# Altium PCB TIPD156 PCB.PcbDoc
Units mil, origin at the board's own origin, x right, y up, seen from the top; angles counter-clockwise.
Board outline 1600 x 1900 mil, 2 copper layers (Top Layer, Bottom Layer); 24 components, 8 nets, 38 pads, 12 vias.
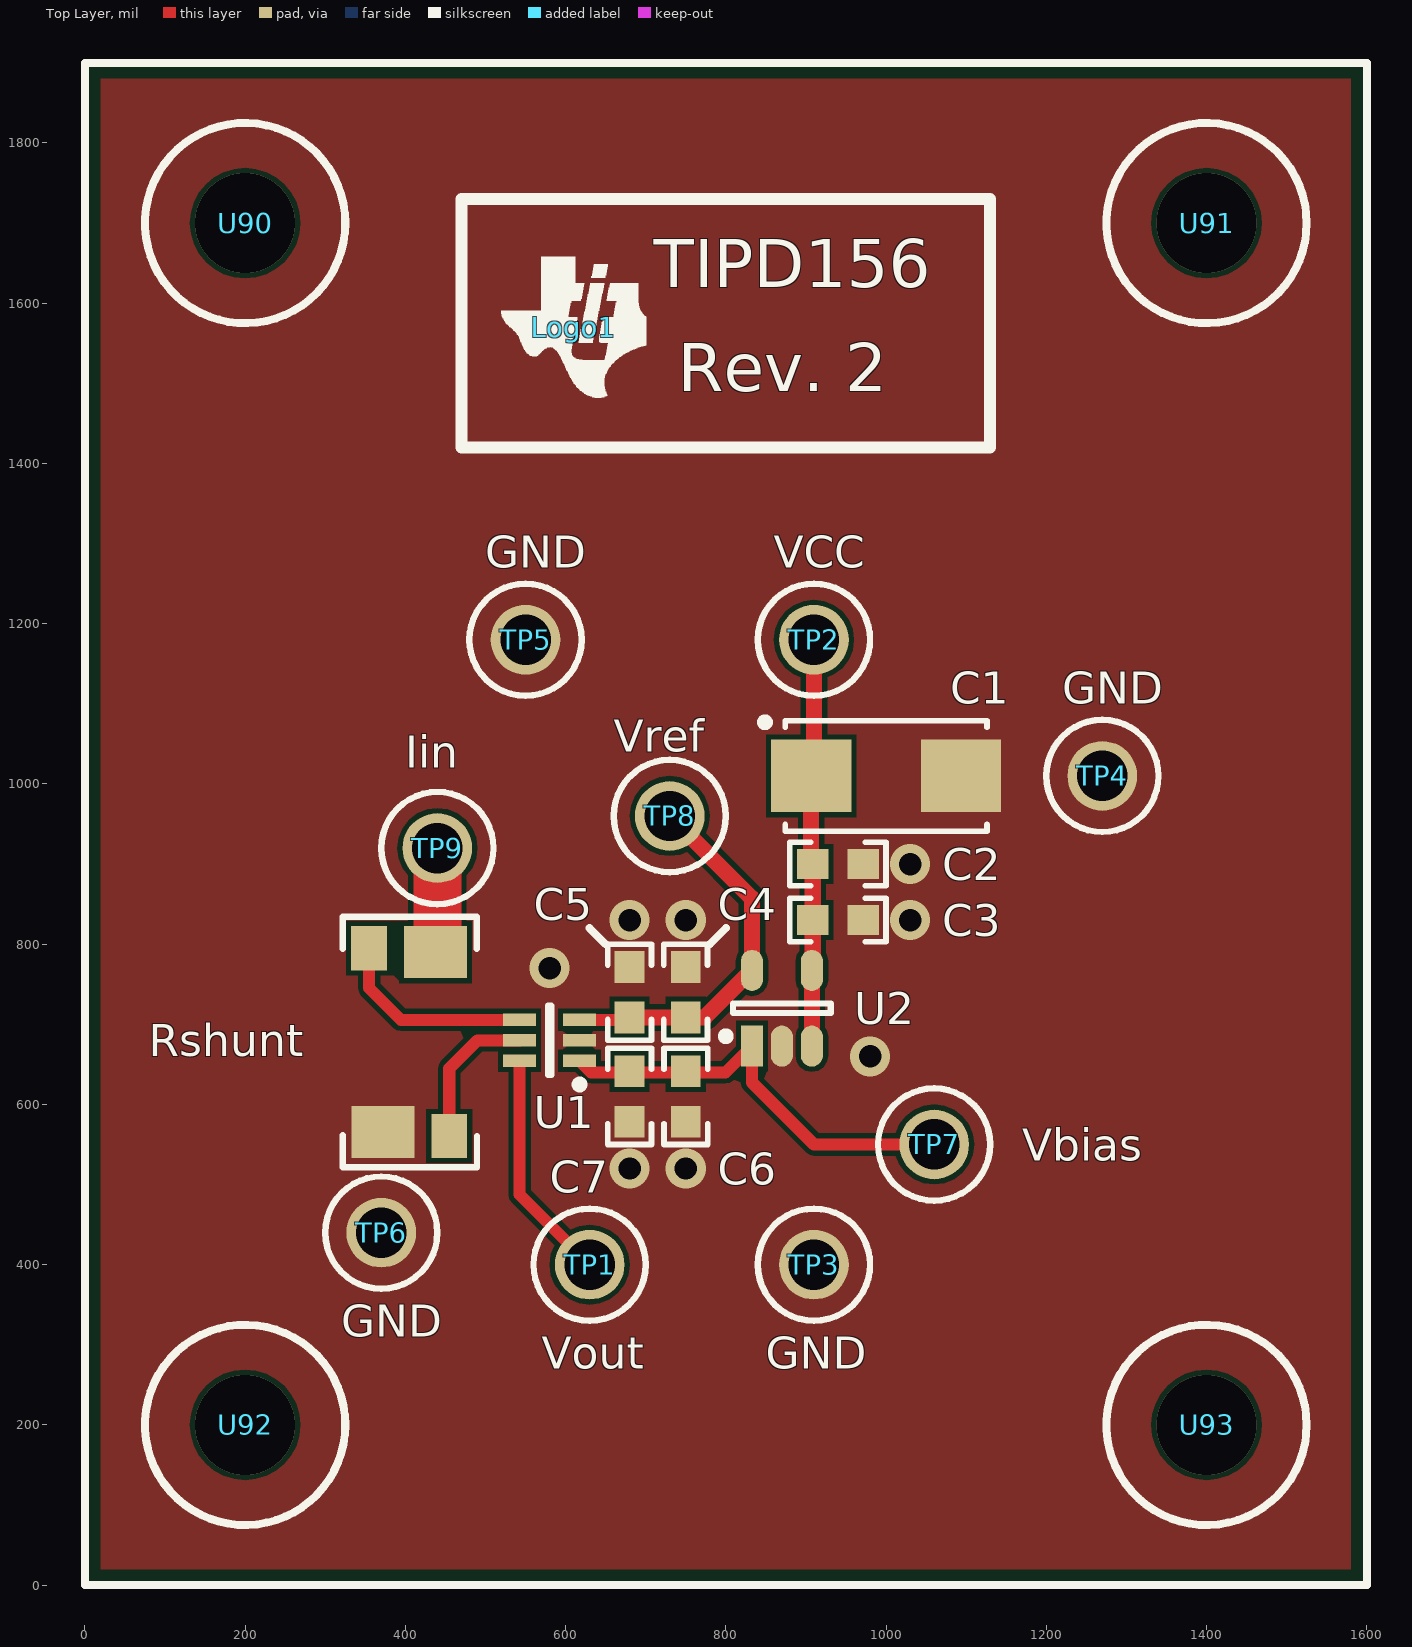
[diagram p0: Top Layer view]
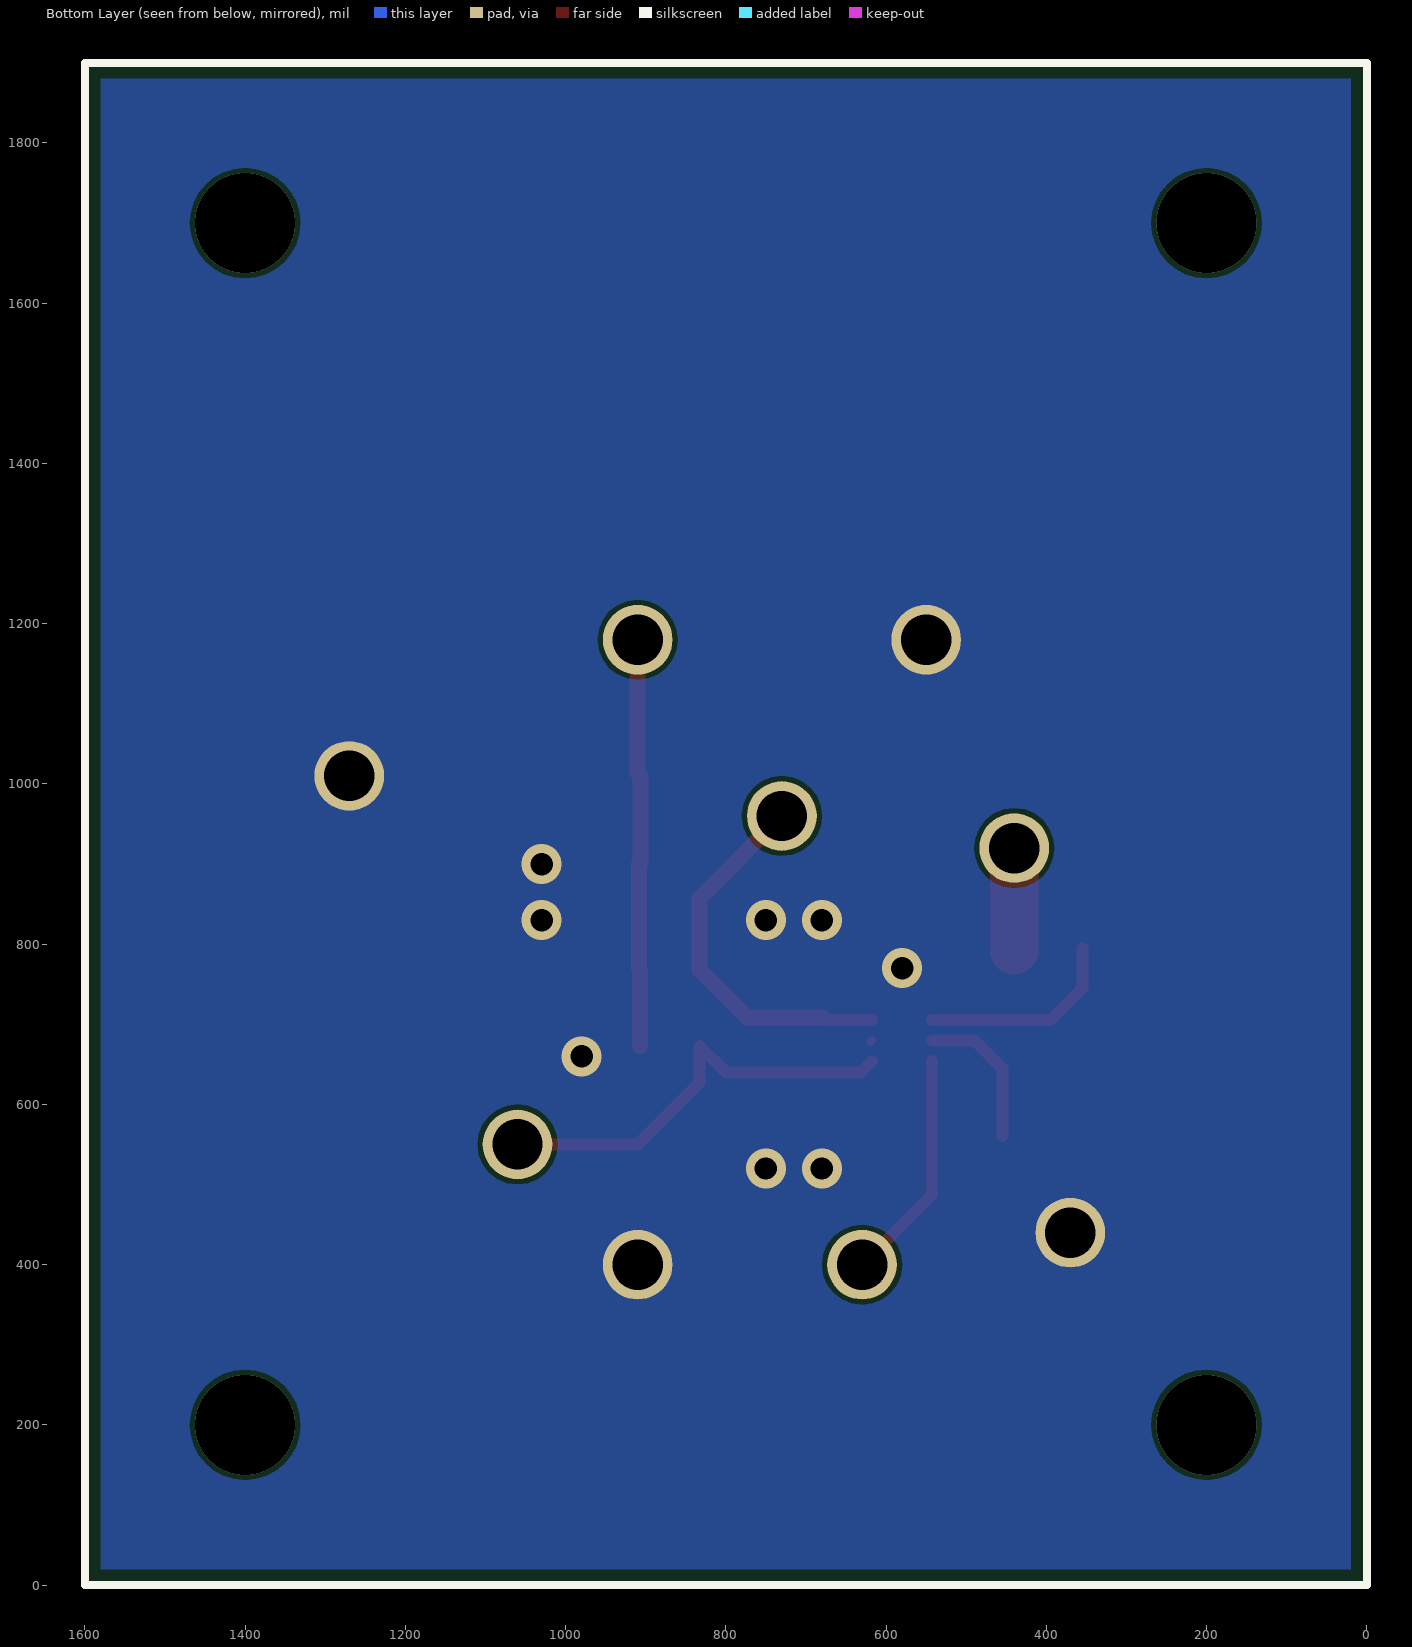
[diagram p1: Bottom Layer view, seen from below]

## Layer stack, top to bottom
Top Layer: signal copper 1.4
Dielectric: core 12.6, FR-4, Dk 4.8
Bottom Layer: signal copper 1.4

## Board outline
0,0 0,1900 1600,1900 1600,0

## Design rules (kind name [scope] priority, off if disabled: settings)
AssemblyTestPointUsage [All] p1 off:
AssemblyTestpoint [All] p1 off: testpointundercomponent=TRUE minsize=40 maxsize=100 preferedsize=60 minholesize=0 maxholesize=40 preferedholesize=32 testpointgrid=1 usegrid=TRUE gridtolerance=0.01 allowsidetop=TRUE allowsidebottom=TRUE
Clearance [All] p1: gap=6
ComponentClearance [All] p1 off: gap=10 collisioncheckmode=3 verticalgap=10 showdistances=FALSE
DiffPairsRouting [All] p1 off: maxlimit=10 minlimit=10 mostfreqgap=10 maxuncoupledlength=500
FabricationTestPointUsage TestPointUsage [All] p1 off: valid=0 allowmultiple=FALSE
FabricationTestpoint Testpoint [All] p1 off: side=3 testpointundercomponent=TRUE minsize=40 maxsize=100 preferedsize=60 minholesize=0 maxholesize=40 preferedholesize=32 testpointgrid=1 allowsidetop=TRUE allowsidebottom=TRUE usegrid=TRUE gridtolerance=0.01
FanoutControl Fanout_BGA [IsBGA] p1 off: bgadir=Out bgaviamode=Centered fanoutstyle=Auto fanoutdirection=Alternating viagrid=1 // Fanout_BGA (Default Rule)
FanoutControl Fanout_LCC [IsLCC] p2 off: bgadir=Out bgaviamode=Centered fanoutstyle=Auto fanoutdirection=Alternating viagrid=1 // Fanout_LCC (Default Rule)
FanoutControl Fanout_SOIC [IsSOIC] p3 off: bgadir=Out bgaviamode=Centered fanoutstyle=Auto fanoutdirection=Alternating viagrid=1 // Fanout_SOIC (Default Rule)
FanoutControl Fanout_Small [(CompPinCount < 5)] p4 off: bgadir=Out bgaviamode=Centered fanoutstyle=Auto fanoutdirection=OutThenIn viagrid=1 // Fanout_Small (Default Rule)
FanoutControl Fanout_Default [All] p5 off: bgadir=Out bgaviamode=Centered fanoutstyle=Auto fanoutdirection=Alternating viagrid=1 // Fanout_Default (Default Rule)
Height [All] p1 off: minheight=0 maxheight=1000 prefheight=500
HoleSize [All] p1: absolutevalues=TRUE maxlimit=400 minlimit=15 maxpercent=80.000 minpercent=20.000
HoleToHoleClearance [All] p1: gap=8 allowstackedmicrovias=TRUE
LayerPairs [All] p1 off: enforce=FALSE
MinimumSolderMaskSliver [All] p1: minsoldermaskwidth=4
PlaneConnect [All] p1: planeconnectstyle=Direct reliefexpansion=20 reliefentries=4 reliefconductorwidth=10 reliefairgap=10
PolygonConnect [All] p1: connectstyle=Direct reliefconductorwidth=25 reliefentries=4 polygonreliefangle="90 Angle" airgapwidth=10
RoutingVias [All] p1: holewidth=15 width=25 viastyle="Through Hole" minholewidth=15 minwidth=25 maxholewidth=400 maxwidth=500
SilkToSilkClearance [All] p1: silktosilkclearance=5
SilkscreenOverComponentPads [All] p1: minsilkscreentomaskgap=5
SolderMaskExpansion [All] p1: expansion=2
Width [All] p1: maxlimit=100 minlimit=6 preferedwidth=10
9 further rules are at their usual default settings.

## Components (designator, comment, footprint, x,y, rotation, side; value= is the part's Value field where it differs from the comment)
C1 "TPSC106K025R0500" 6032-28 1000,1010 r0 top
C2 "C1608X7R1C105K" 0603 940,900 r0 top
C3 "06033C104KAT2A" 0603 940,830 r0 top
C4 "06033C104KAT2A" 0603 750,740 r90 top
C5 "06035A101JAT2A" 0603 680,740 r90 top
C6 "06033C104KAT2A" 0603 750,610 r270 top
C7 "06035A101JAT2A" 0603 680,610 r270 top
Logo1 "Texas Instruments" TI_Symbol_Overlay_Small 610,1570 r0 top
Rshunt "" CSM2512 300,790 r270 top (schematic designator R?)
TP1 "Vout" Keystone5007 630,400 r90 top
TP2 "VCC" Keystone5005 910,1180 r180 top
TP3 "GND" Keystone5006 910,400 r90 top
TP4 "GND" Keystone5006 1270,1010 r90 top
TP5 "GND" Keystone5006 550,1180 r90 top
TP6 "GND" Keystone5006 370,440 r90 top
TP7 "Vbias" Keystone5009 1060,550 r90 top
TP8 "Vref" Keystone5008 730,960 r90 top
TP9 "Iin" Keystone5009 440,920 r90 top
U1 "INA213" "SC70-6 (DCK) Low Density" 580,680 r180 top
U2 "REF2030" "SOT23-5 (DBV) low density" 870,720 r90 top
U90 "Standoff" "STANDOFF HEX 4-40THR ALUM 1\"L" 200,1700 r0 top
U91 "Standoff" "STANDOFF HEX 4-40THR ALUM 1\"L" 1400,1700 r0 top
U92 "Standoff" "STANDOFF HEX 4-40THR ALUM 1\"L" 200,200 r0 top
U93 "Standoff" "STANDOFF HEX 4-40THR ALUM 1\"L" 1400,200 r0 top

## Footprints (in the part's own frame and the unit in brackets; to place one, negate y for a bottom-side part, rotate by r counter-clockwise, add the part's x,y. Pads: shape width x height; smd on the part's side, far side on the other; paste and mask are expansions set on the pad)
0603 [mm] "0603 from SM-752 data"
  rect 1x0.95 smd: 1(-0.8,0) 2(0.8,0)
  silkscreen extent -1.52,-0.69 1.52,0.69, body extent -0.87,-0.47 0.87,0.47, height 0.85
6032-28 [mm] "Medium Density IPC based on Vishay Sprague 293D datasheet."
  rect 2.55x2.3 smd: 1(-2.375,0) 2(2.375,0)
  silkscreen extent -3.96,-1.75 3.2,1.82, body extent -3.15,-1.75 3.15,1.75, height 2.8
CSM2512 [mm]
  rect 1.4x1.14 smd: E1(-0.124,1.394) E2(5.83,3.932)
  rect 1.65x2 smd: I1(0,3.499) I2(5.707,1.827)
  silkscreen extent -1.12,0.56 6.82,4.81
Keystone5005 [mil] "Keystone Compact loops"
  round 87 hole 63: 1(0,0)
  silkscreen extent -70,-70 70,70, body extent -63,-63 62,63, height 225
Keystone5006 [mil] "Keystone Compact loops"
  round 87 hole 63: 1(0,0)
  silkscreen extent -70,-70 70,70, body extent -63,-63 62,63, height 225
Keystone5007 [mil] "Keystone Compact loops"
  round 87 hole 63: 1(0,0)
  silkscreen extent -70,-70 70,70, body extent -63,-63 62,63, height 225
Keystone5008 [mil] "Keystone Compact loops"
  round 87 hole 63: 1(0,0)
  silkscreen extent -70,-70 70,70, body extent -63,-63 62,63, height 225
Keystone5009 [mil] "Keystone Compact loops"
  round 87 hole 63: 1(0,0)
  silkscreen extent -70,-70 70,70, body extent -63,-63 62,63, height 225
"SC70-6 (DCK) Low Density" [mm] "SOT23, 6-Leads, Body 2x1.3mm, Pitch 0.65mm, Lead Span 2.1mm, IPC Low Density"
  rect 1.05x0.4 smd: 1(-0.95,0.65) 2(-0.95,0) 3(-0.95,-0.65) 4(0.95,-0.65) 5(0.95,0) 6(0.95,0.65)
  silkscreen extent -1.07,-1.1 0.05,1.52, body extent -0.7,-1.07 0.7,1.08, height 1.1
"SOT23-5 (DBV) low density" [mm] "SOT23, 5-Leads, Body 2.9x1.6mm, Pitch 0.95mm, Lead Span 2.8mm, IPC Low Density"
  rect 1.3x0.7 smd: 1(-1.2,0.95)
  oval 1.3x0.7 smd: 2(-1.2,0) 3(-1.2,-0.95) 4(1.2,-0.95) 5(1.2,0.95)
  silkscreen extent -1.01,-1.55 0.15,1.9, body extent -0.9,-1.55 0.9,1.55, height 1.19
"STANDOFF HEX 4-40THR ALUM 1\"L" [mil] "STANDOFF HEX 4-40THR ALUM 1\"L"
  silkscreen extent -125,-125 125,125
TI_Symbol_Overlay_Small [mil]
  silkscreen extent -90,-88 91,88

## Part data
C1: "CAP, TA, 10uF, 25V, +/-10%, 0.5 ohm, SMD"
C2: "CAP, CERM, 1uF, 16V, +/-10%, X7R, 0603"
C3 C4 C6: "CAP, CERM, 0.1uF, 25V, +/-10%, X7R, 0603"
C5 C7: "CAP, CERM, 100pF, 50V, +/-5%, C0G/NP0, 0603"
Logo1: library part TI_Logo, "Texas Instrument Corporate Signature"
Rshunt: library part "10m ohm shunt resistor", "RES, 0.010 ohm, 0.1%, 1W, CSM2512"
TP1: library part 5007, "Test Point, Compact, White, TH"
TP2: library part 5005, "Test Point, TH, Compact, Red"
TP3 TP4 TP5 TP6: library part 5006, "Test Point, TH, Compact, Black"
TP7 TP9: library part 5009, "Test Point, Compact, Yellow, TH"
TP8: library part 5008, "Test Point, Compact, Orange, TH"
U90 U91 U92 U93: library part "Standoff, 1\", 4-40, Alum, F-F", "STANDOFF HEX 4-40THR ALUM 1\"L"

## Via types
v1: diameter 50, hole 28, Top Layer to Bottom Layer, 8 vias
v2: diameter 125, hole 125, Top Layer to Bottom Layer, 4 vias

## Nets (pads, with @x,y where several pads share a name; then routed paths per layer and width w, separated by ;. In a path a pad name is that pad's centre, name@x,y a point inside that pad or via, vN(x,y) a via of type N, cw(c..) or ccw(c..) an arc to the next point about the centre after c; other vN are vias at no path point)
GND: C1.2 C2.2 C3.2 C4.2 C5.2 C6.2 C7.2 Rshunt.I2 TP3.1 TP4.1 TP5.1 TP6.1 U1.2 U2.2 | length 3.1
  Top Layer w10: U1.2 U1.2@619.58,677.82
  other v1: 680,520 750,520 980,660 580,770 680,830 750,830 1030,830 1030,900
NetC6_1: C6.1 C7.1 TP7.1 U1.1 U2.1 | length 539.6
  Top Layer w15: U1.1 631.81,640 799.84,640 U2.1 832.6,627.4 910,550 TP7.1
NetRshunt_E1: Rshunt.E1 U1.4 | length 253.8
  Top Layer w15: Rshunt.E1 354.9,745.1 394.41,705.59 U1.4
NetRshunt_E2: Rshunt.E2 U1.5 | length 186.7
  Top Layer w15: Rshunt.E2 454.81,644.81 490,680 U1.5
NetRshunt_I1: Rshunt.I1 TP9.1 | length 127.8
  Top Layer w60: Rshunt.I1@440,792.23 TP9.1
NetTP1_1: TP1.1 U1.6 | length 290.6
  Top Layer w15: U1.6 542.6,583.94 542.6,487.4 TP1.1
VCC: C1.1 C2.1 C3.1 TP2.1 U2.3 U2.4 | length 503.5
  Top Layer w10: C2.1@906.5,902.01 C2.1
  Top Layer w20: C2.1@906.5,902.01 C1.1 ; U2.3 U2.4 ; U2.4@908.5,768.35 C3.1 C2.1 ; C1.1@910,1013.5 TP2.1
VREF: C4.1 C5.1 TP8.1 U1.3 U2.5 | length 476
  Top Layer w10: C5.1@677.09,705.59 C5.1
  Top Layer w15: U1.3 C5.1@677.09,705.59
  Top Layer w20: C5.1 C4.1 773.86,708.5 U2.5 832.6,837.4 832.6,857.4 TP8.1
copper on no net: | length 14000
  Top Layer w10: 0,0 0,1900 1600,1900 1600,0 0,0
  Bottom Layer w10: 0,0 0,1900 1600,1900 1600,0 0,0
  other v2: 200,200 1400,200 200,1700 1400,1700

## Polygon pours and split planes (outlines as drawn)
GND on Top Layer "Top Layer-No Net" (solid, pour order 4): 20,1880 1580,1880 1580,20 20,20
GND on Bottom Layer "Bottom Layer-No Net" (solid, pour order 6): 20,1880 1580,1880 1580,20 20,20

## Keep-outs
Keep-Out Layer:
  the board outline again, w10

## Silkscreen, mask and mechanical layers (free items; w line width, h text height)
Top Overlay:
  lines w10: 630,820 650,800 ; 780,800 800,820 ; 0,0 0,1900 1600,1900 1600,0 0,0
  lines w15: 470,1420 1130,1420 1130,1730 470,1730 470,1420
  text "TIPD156" at 710,1620 h60
  text "Rev. 2" at 740,1490 h60
Bottom Overlay:
  the board outline again, w10